# EAGLE board v001 (EAGLE 6.4)
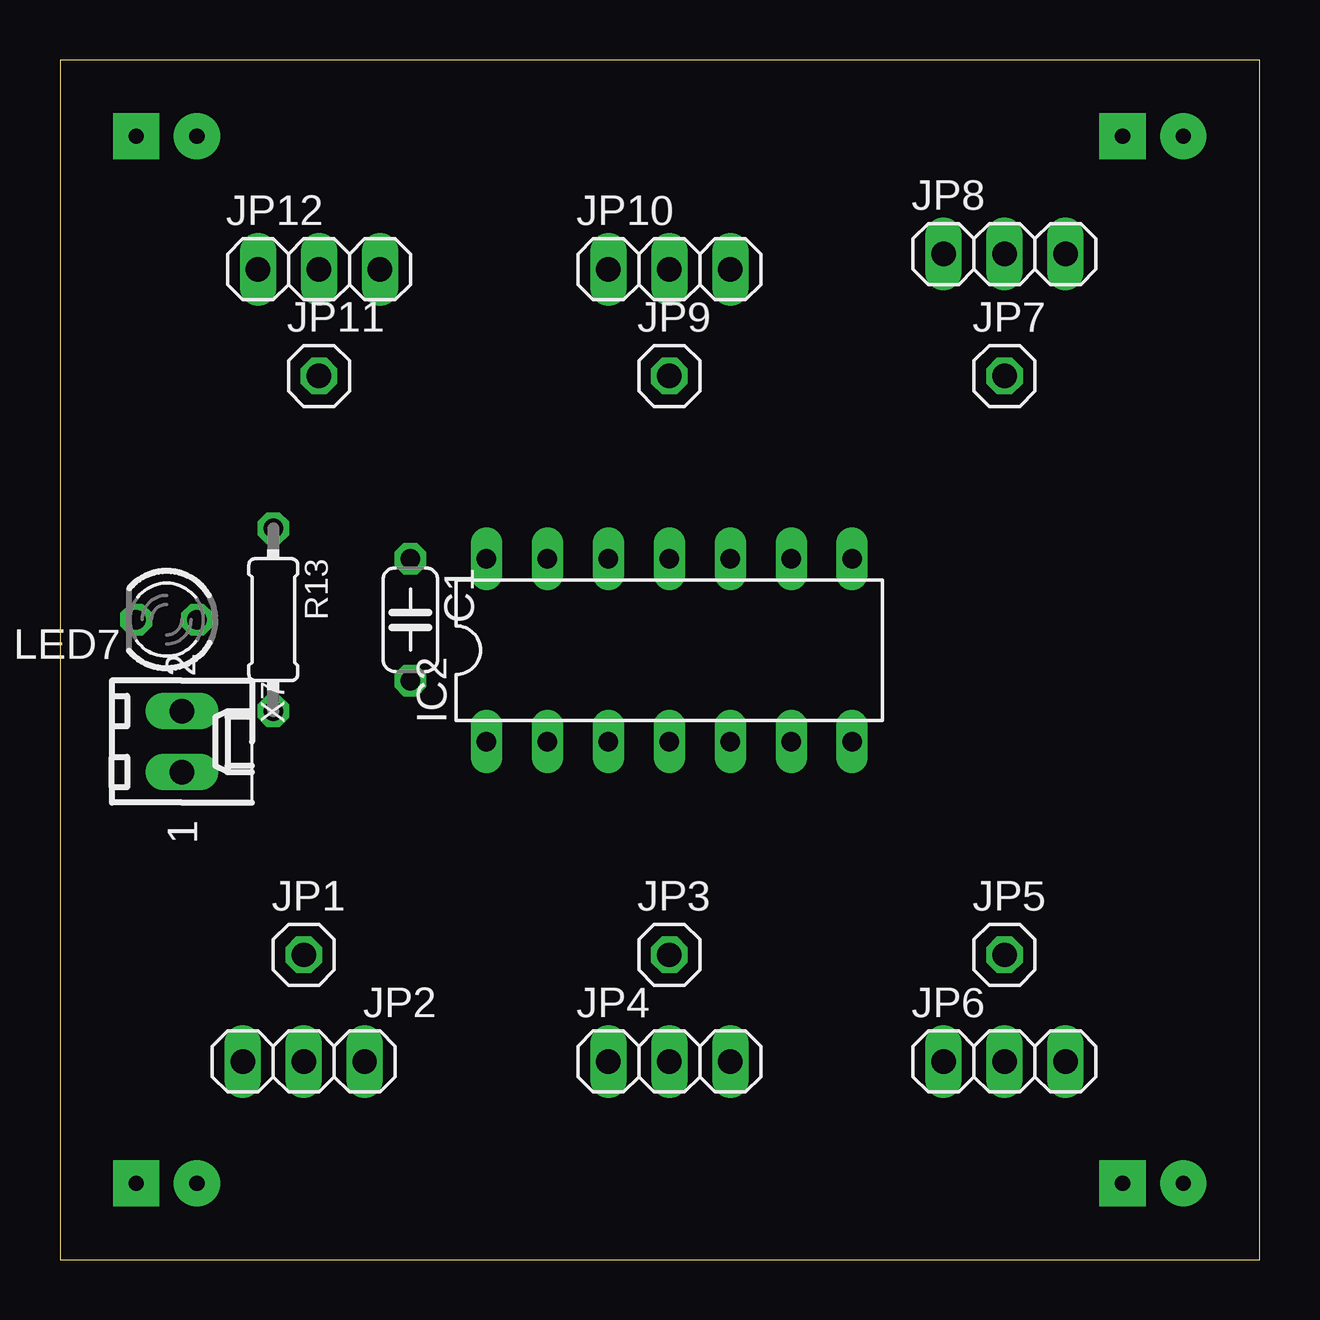
[diagram p0: board, top side]
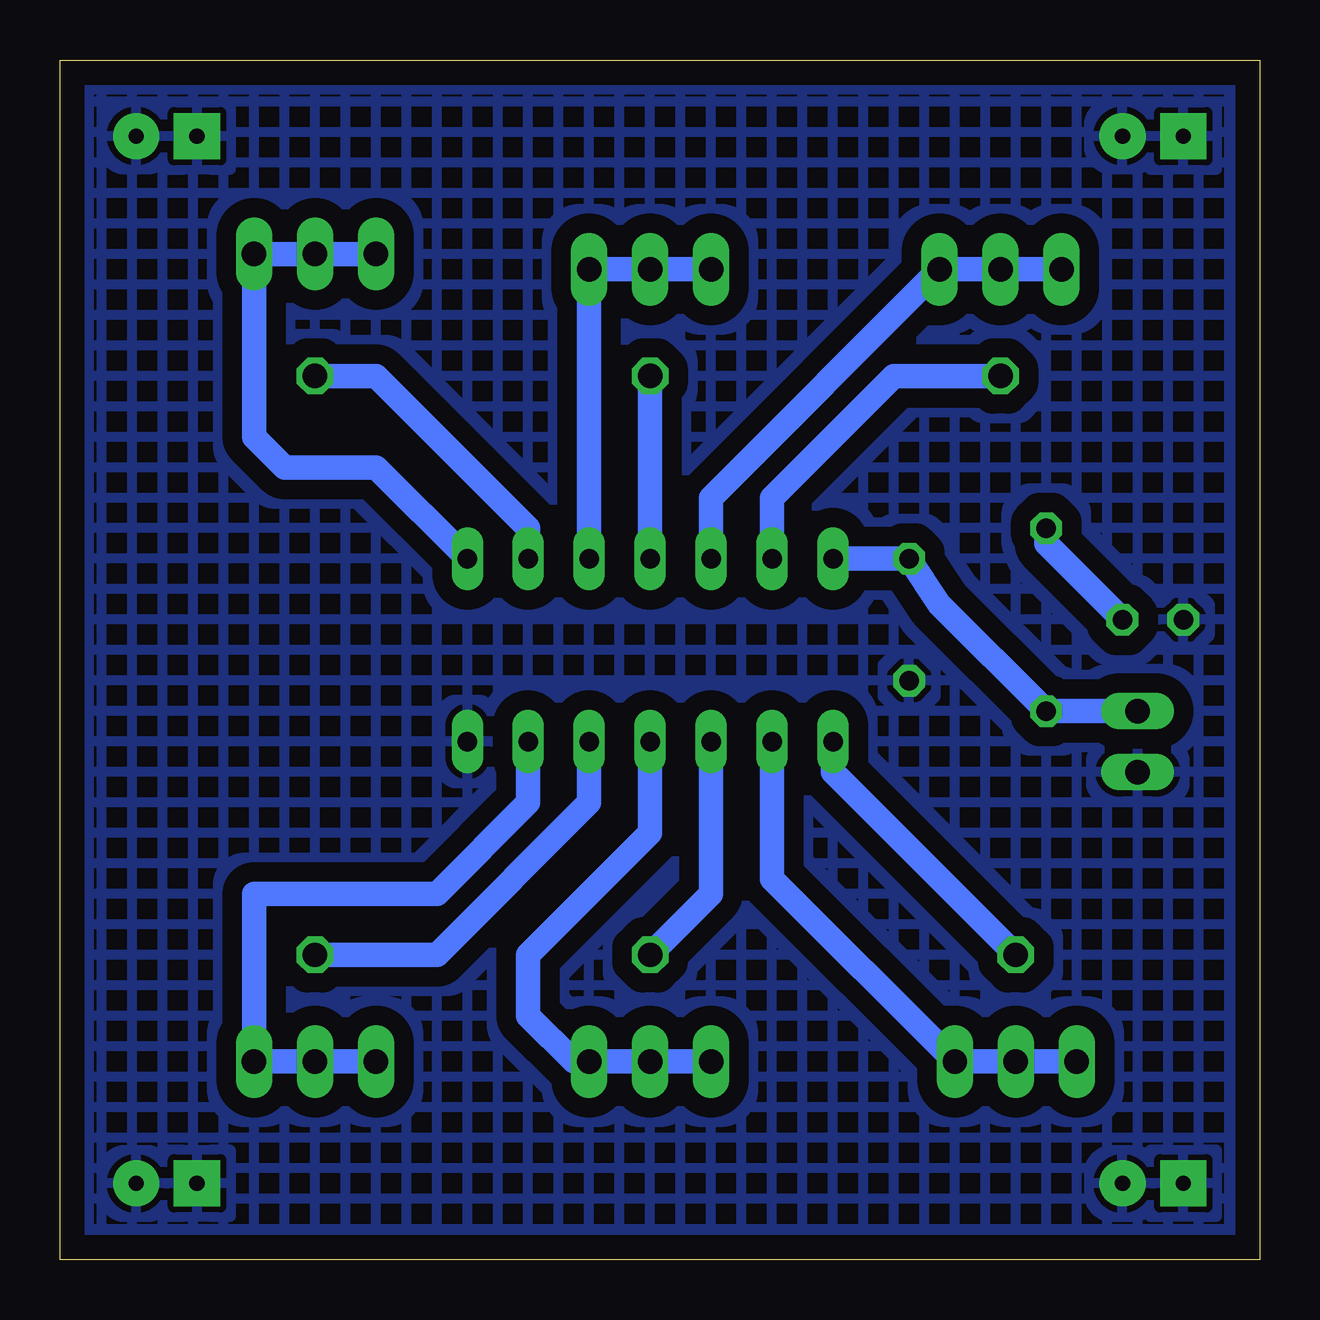
[diagram p1: board, bottom side, seen from below]

Size 50 x 50 mm. Coordinates in mm from the lower left corner, seen from the top.
Outline: 0,0 50,0 50,50 0,50 0,0
Copper layers (1*16): Top 0.035mm / dielectric 1.5mm / Bottom 0.035mm
Design rules "default": minimum track width 10mil, minimum drill 24mil, track to track 8mil, track to pad 8mil, pad to pad 8mil, via to via 8mil, smd to smd 8mil, copper to edge 40mil, drill to drill 8mil, minimum pad ring 10mil, minimum via ring 8mil, stop-mask expansion 4mil, vias tented up to drill 0mil, thermal gap 10mil

## Footprints (pad centres in the part's own frame; a part is rotated, then mirrored left to right if it is on the bottom)
C050-024X044 = drill 0.813 octagon: 1 -2.54,0; 2 2.54,0
DIL14 = drill 0.813 long: 1 -7.62,-3.81; 2 -5.08,-3.81; 3 -2.54,-3.81; 4 0,-3.81; 5 2.54,-3.81; 6 5.08,-3.81; 7 7.62,-3.81; 8 7.62,3.81; 9 5.08,3.81; 10 2.54,3.81; 11 0,3.81; 12 -2.54,3.81; 13 -5.08,3.81; 14 -7.62,3.81
1X01 = drill 1.016 octagon: 1 0,0
1X03 = drill 1.016 long: 1 -2.54,0; 2 0,0; 3 2.54,0
LED3MM = drill 0.813 octagon: A -1.27,0; K 1.27,0
PCB_05X05 = drill 0.64 pad 1.93 square: GND@1 3.175,46.825; GND@2 44.285,46.825; GND@7 3.175,3.175; GND@8 44.285,3.175 | drill 0.64 pad 1.93: GND@3 46.825,46.825; GND@4 5.715,46.825; GND@5 46.825,3.175; GND@6 5.715,3.175
0204/7 = drill 0.813 octagon: 1 -3.81,0; 2 3.81,0
6410-02 = drill 1.016 long: 1 1.27,0; 2 -1.27,0

## Placement (x,y rotation side)
C1  0.1uF  [C050-024X044]  14.61,26.67 270 top
IC2  Like 7404  [DIL14]  25.4,25.4 0 top
JP1  [1X01]  10.16,12.7 0 top
JP2  Output  [1X03]  10.16,8.26 0 top
JP3  [1X01]  25.4,12.7 0 top
JP4  Output  [1X03]  25.4,8.26 0 top
JP5  [1X01]  39.37,12.7 0 top
JP6  Output  [1X03]  39.37,8.26 0 top
JP7  [1X01]  39.37,36.83 0 top
JP8  Output  [1X03]  39.37,41.91 0 top
JP9  [1X01]  25.4,36.83 0 top
JP10  Output  [1X03]  25.4,41.27 0 top
JP11  [1X01]  10.79,36.83 0 top
JP12  Output  [1X03]  10.79,41.27 0 top
LED7  Green  [LED3MM]  4.45,26.67 180 top
PCB1  PCB05X05  [PCB_05X05]  0,0 0 top
R13  470R  [0204/7]  8.89,26.67 270 top
X7  Power  [6410-02]  5.08,21.59 270 top

## Library data of the parts
C1 R13 = rcl
IC2 = 74xx-us
JP1-JP12 = pinhead
LED7 = led
PCB1 = GNLib
X7 = con-molex

## Nets
+5V: C1.1 IC2.14 R13.2 X7.2
GND: C1.2 IC2.7 LED7.K PCB1.GND@1 PCB1.GND@2 PCB1.GND@3 PCB1.GND@4 PCB1.GND@5 PCB1.GND@6 PCB1.GND@7 PCB1.GND@8 X7.1
JP12: IC2.12 JP12.1 JP12.2 JP12.3
N$1: IC2.1 JP1.1
N$2: IC2.2 JP2.1 JP2.2 JP2.3
N$5: LED7.A R13.1
N$6: IC2.3 JP3.1
N$7: IC2.4 JP4.1 JP4.2 JP4.3
N$8: IC2.5 JP5.1
N$9: IC2.6 JP6.1 JP6.2 JP6.3
N$10: IC2.9 JP7.1
N$11: IC2.8 JP8.1 JP8.2 JP8.3
N$12: IC2.11 JP9.1
N$13: IC2.10 JP10.1 JP10.2 JP10.3
N$14: IC2.13 JP11.1

## Tracks (layer width: path | path; a pad name or v marks a point on that pad's centre or on a via)
+5V
  Bottom 1.016: X7.2 R13.2 13.34,27.3 C1.1 IC2.14
GND
  pour Bottom (isolate 0.813, hatched): 50.16,50.16 0,50.16 0,0 50.16,0
JP12
  Bottom 1.016: IC2.12 22.86,31.75 JP12.3 JP12.2 JP12.1
N$1
  Bottom 1.016: JP1.1 17.78,20.32 IC2.1
N$2
  Bottom 1.016: IC2.2 20.32,15.88 JP2.3 JP2.2 JP2.1
N$5
  Bottom 1.016: LED7.A 8.89,29.84 R13.1
N$6
  Bottom 1.016: IC2.3 22.86,15.24 JP3.1
N$7
  Bottom 1.016: IC2.4 25.4,17.78 30.48,12.7 30.48,10.16 28.57,8.26 JP4.3 JP4.2 JP4.1
N$8
  Bottom 1.016: IC2.5 27.94,19.05 34.29,12.7 JP5.1
N$9
  Bottom 1.016: JP6.1 JP6.2 JP6.3 41.91,15.24 34.29,15.24 30.48,19.05 IC2.6
N$10
  Bottom 1.016: JP7.1 36.83,36.83 30.48,30.48 IC2.9
N$11
  Bottom 1.016: IC2.8 36.83,33.02 40.64,33.02 41.91,34.29 JP8.3 JP8.2 JP8.1
N$12
  Bottom 1.016: IC2.11 JP9.1
N$13
  Bottom 1.016: IC2.10 JP10.3 JP10.2 JP10.1
N$14
  Bottom 1.016: IC2.13 20.32,31.75 15.24,36.83 JP11.1